# Altium PCB SPI Isolator.PcbDoc
Units mm, origin at the board's own origin, x right, y up, seen from the top; angles counter-clockwise.
Board outline 45 x 37.5 mm, 2 copper layers (Top Layer, Bottom Layer), stack 1.621 mm thick; 50 components, 25 nets, 118 pads, 154 vias.
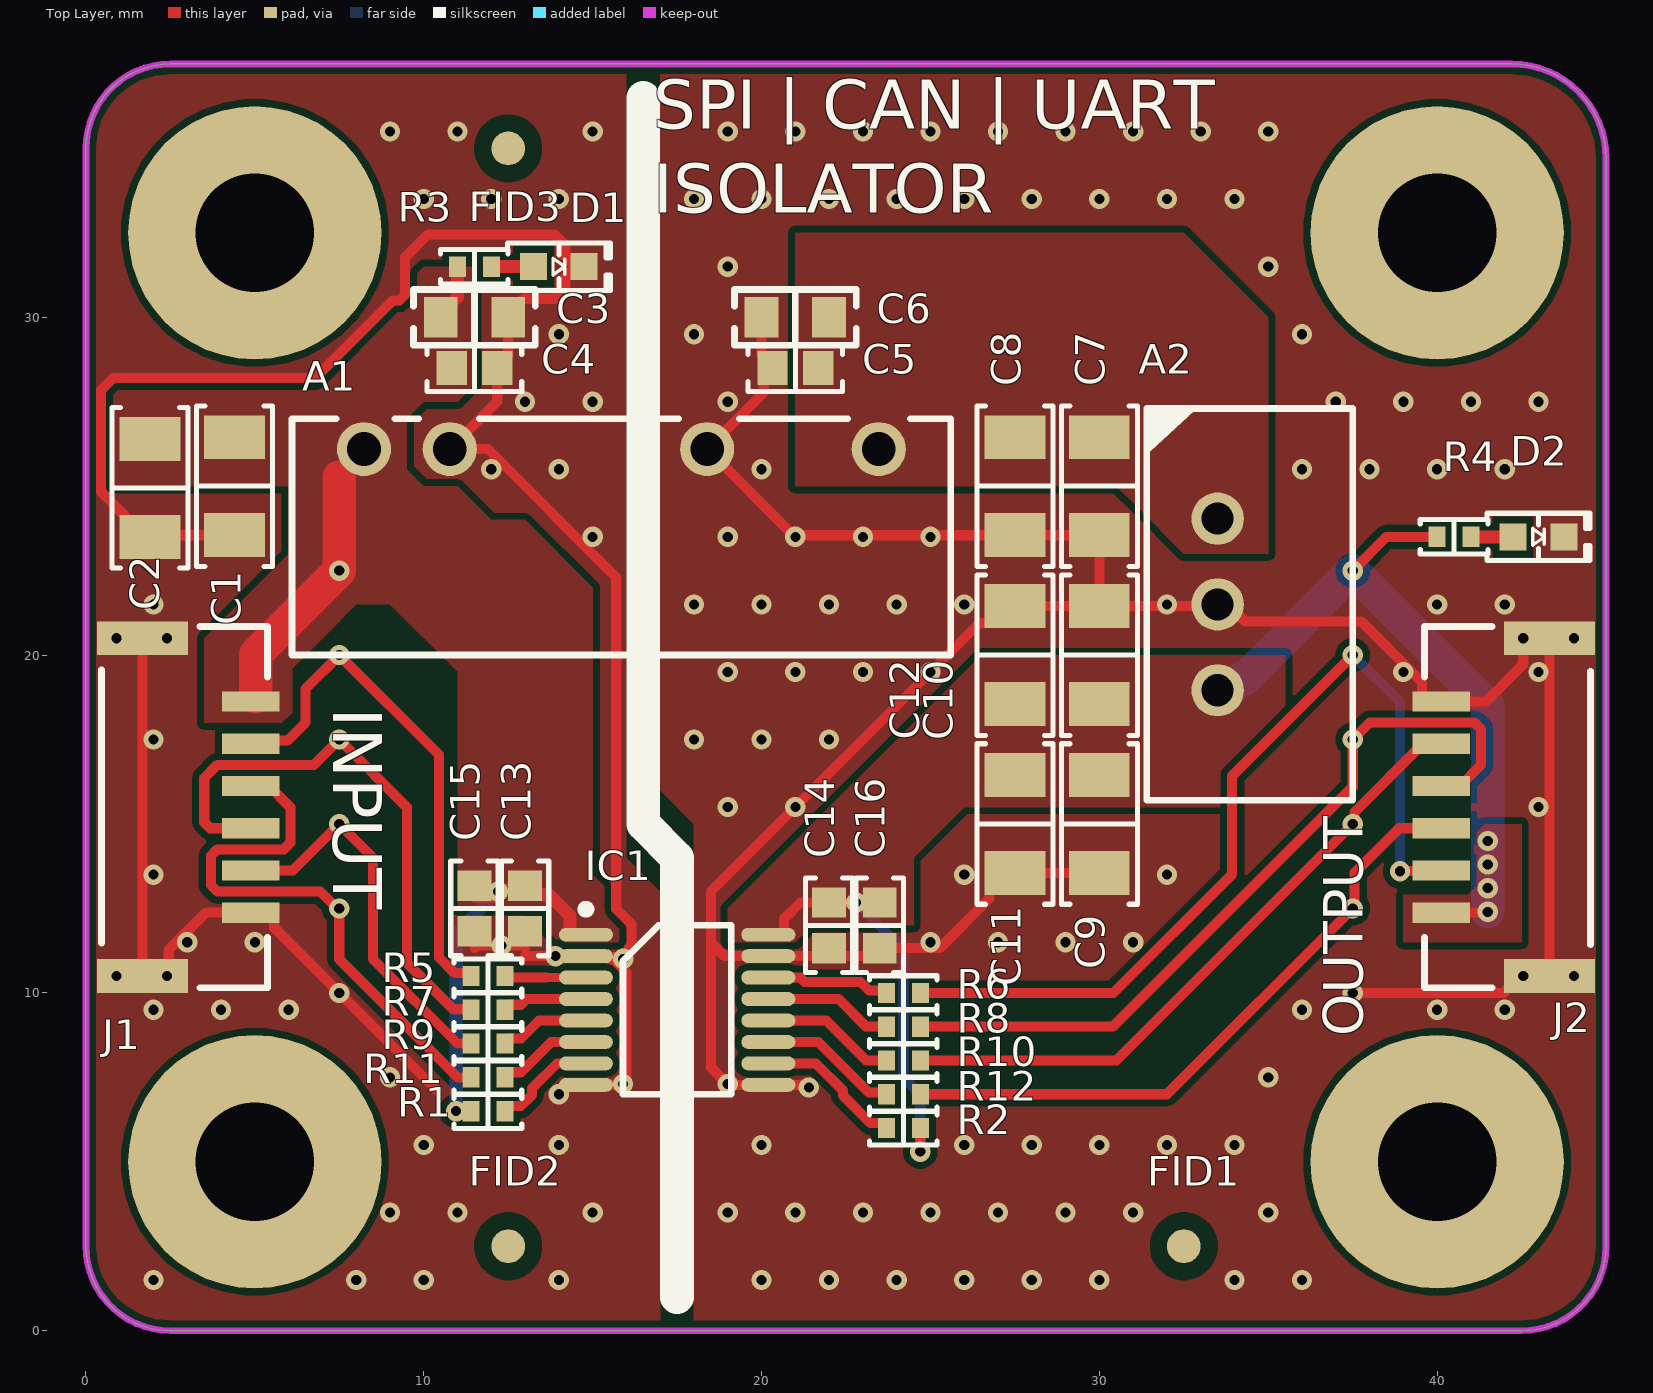
[diagram p0: Top Layer view]
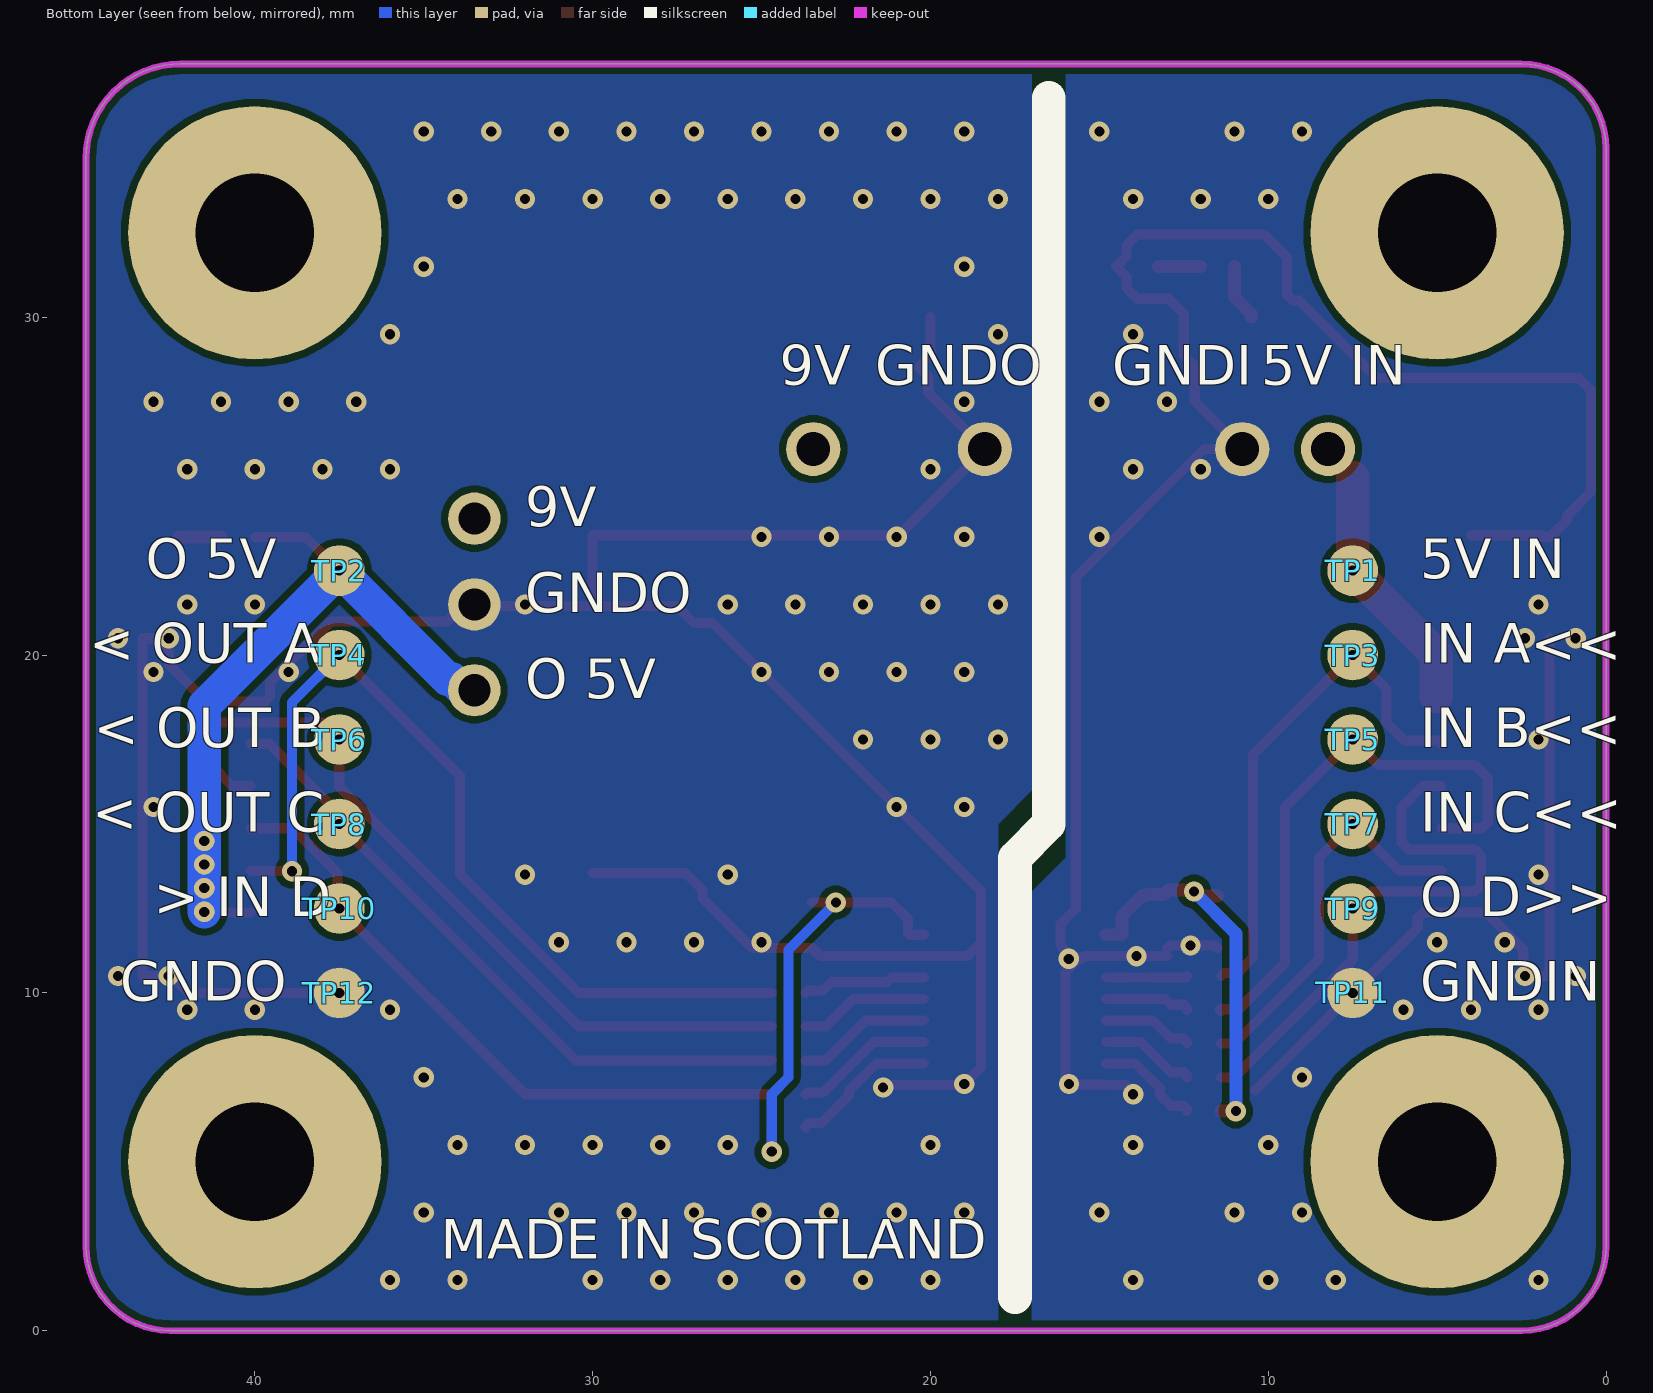
[diagram p1: Bottom Layer view, seen from below]

## Layer stack, top to bottom
Top Solder: solder mask 0.0102, Solder Resist, Dk 3.8
Top Layer: signal copper 0.0356
Dielectric 1: dielectric 1.55, FR-4, Dk 4.6
Bottom Layer: signal copper 0.0356
Bottom Solder: solder mask 0.0102, Solder Resist, Dk 3.8

## Board outline
0,2.5 0,35 cw(c2.5,35) 2.5,37.5 42.206,37.5 cw(c42.206,34.706) 45,34.706 45,2.5 cw(c42.5,2.5) 42.5,0 2.5,0 cw(c2.5,2.5)

## Design rules (kind name [scope] priority, off if disabled: settings)
Clearance [All] p1: gap=0.2 ignorepadtopadclearanceinfootprint=FALSE
ComponentClearance [All] p1: gap=0.254 collisioncheckmode=3 verticalgap=0.254 showdistances=TRUE
MinimumSolderMaskSliver [All] p1: minsoldermaskwidth=0.1
PlaneClearance [All] p1: clearance=0.2
PolygonConnect [All] p1: connectstyle=Direct reliefconductorwidth=0.254 reliefentries=4 polygonreliefangle="90 Angle" airgapwidth=0.254
RoutingVias [All] p1: holewidth=0.3 width=0.6 viastyle="Through Hole" minholewidth=0.3 minwidth=0.6 maxholewidth=6.3 maxwidth=6.6
SilkToSilkClearance [All] p1: silktosilkclearance=-3
SilkToSolderMaskClearance [IsPad] p1: minsilkscreentomaskgap=-3 clearancetoexposedcopper=TRUE
SolderMaskExpansion SolderMaskExpansion_Via [IsVia] p1: expansion=0.102 istentingtop=TRUE
SolderMaskExpansion [All] p2: expansion=0.05 istentingtop=FALSE
SupplyNets "Schematic Supply Nets_4" [InNet('DGND')] p1: voltage=0.000
SupplyNets "Schematic Supply Nets_3" [InNet('UGND')] p2: voltage=0.000
SupplyNets "Schematic Supply Nets_2" [InNet('U5V')] p3: voltage=0.000
SupplyNets "Schematic Supply Nets_1" [InNet('5VO')] p4: voltage=0.000
SupplyNets "Schematic Supply Nets" [InNet('9V')] p5: voltage=0.000
Width [All] p1: maxlimit=3 minlimit=0.09 preferedwidth=0.2
25 further rules are at their usual default settings.

## Components (designator, comment, footprint, x,y, rotation, side; value= is the part's Value field where it differs from the comment)
A1 "3S7B_0509S3U" "GAPTEC 3S7B_3U SINGLE" 16,23.5 r0 top
A2 "LCB78_05-0.5" "GAPTEC LCB78_0.5" 34.5,21.5 r270 top
C1 "10 µF" "CAP 1206_3216 - 0.8MM" 4.4,25 r90 top
C2 "10 µF" "CAP 1206_3216 - 0.8MM" 1.9,24.95 r90 top
C3 "4.7 µF" "MURATA GRM188 0603_1608" 11.5,30 r180 top
C4 "0.1 µF" "CAP 0603_1608" 11.5,28.5 r180 top
C5 "0.1 µF" "CAP 0603_1608" 21,28.5 r0 top
C6 "4.7 µF" "MURATA GRM188 0603_1608" 21,30 r0 top
C7 "10 µF" "CAP 1206_3216 - 0.8MM" 30,25 r90 top
C8 "10 µF" "CAP 1206_3216 - 0.8MM" 27.5,25 r90 top
C9 "10 µF" "CAP 1206_3216 - 0.8MM" 30,15 r90 top
C10 "10 µF" "CAP 1206_3216 - 0.8MM" 30,20 r270 top
C11 "10 µF" "CAP 1206_3216 - 0.8MM" 27.5,15 r90 top
C12 "10 µF" "CAP 1206_3216 - 0.8MM" 27.5,20 r270 top
C13 "0.1 µF" "CAP 0603_1608" 13,12.5 r270 top
C14 "0.1 µF" "CAP 0603_1608" 22,12 r90 top
C15 "0.1 µF" "CAP 0603_1608" 11.5,12.5 r270 top
C16 "0.1 µF" "CAP 0603_1608" 23.5,12 r90 top
D1 "Green" "LED 0603_1608 GREEN" 14,31.5 r0 top
D2 "Green" "LED 0603_1608 GREEN" 43,23.5 r0 top
FID1 "Fiducial" Fiducial-1mm 32.5,2.5 r90 top
FID2 "Fiducial" Fiducial-1mm 12.5,2.5 r90 top
FID3 "Fiducial" Fiducial-1mm 12.5,35 r90 top
IC1 "ISO6541QDBQRQ1" "TI SSOP-16 DBQ0016A" 17.5,9.5 r0 top
J1 "SM06B-GHS-TB(LF)(SN)" "JST SM06B-GHS-TB" 3,15.5 r90 top
J2 "SM06B-GHS-TB(LF)(SN)" "JST SM06B-GHS-TB" 42,15.5 r270 top
R1 "1 kOhms" "YAGEO RES 0402_1005" 11.9,6.5 r0 top
R2 "1 kOhms" "YAGEO RES 0402_1005" 24.2,6 r180 top
R3 "1 kOhms" "YAGEO RES 0402_1005" 11.5,31.5 r0 top
R4 "1 kOhms" "YAGEO RES 0402_1005" 40.5,23.5 r0 top
R5 "33 Ohms" "YAGEO RES 0402_1005" 11.9,10.5 r180 top
R6 "10 Ohms" "YAGEO RES 0402_1005" 24.2,10 r0 top
R7 "33 Ohms" "YAGEO RES 0402_1005" 11.9,9.5 r180 top
R8 "10 Ohms" "YAGEO RES 0402_1005" 24.2,9 r0 top
R9 "33 Ohms" "YAGEO RES 0402_1005" 11.9,8.5 r180 top
R10 "10 Ohms" "YAGEO RES 0402_1005" 24.2,8 r0 top
R11 "10 Ohms" "YAGEO RES 0402_1005" 11.9,7.5 r0 top
R12 "33 Ohms" "YAGEO RES 0402_1005" 24.2,7 r180 top
TP1 "Test Point" TestPoint-1.5mm 7.5,22.5 r180 bottom
TP2 "Test Point" TestPoint-1.5mm 37.5,22.5 r90 bottom
TP3 "Test Point" TestPoint-1.5mm 7.5,20 r90 bottom
TP4 "Test Point" TestPoint-1.5mm 37.5,20 r90 bottom
TP5 "Test Point" TestPoint-1.5mm 7.5,17.5 r90 bottom
TP6 "Test Point" TestPoint-1.5mm 37.5,17.5 r90 bottom
TP7 "Test Point" TestPoint-1.5mm 7.5,15 r90 bottom
TP8 "Test Point" TestPoint-1.5mm 37.5,15 r90 bottom
TP9 "Test Point" TestPoint-1.5mm 7.5,12.5 r90 bottom
TP10 "Test Point" TestPoint-1.5mm 37.5,12.5 r90 bottom
TP11 "Test Point" TestPoint-1.5mm 7.5,10 r90 bottom
TP12 "Test Point" TestPoint-1.5mm 37.5,10 r90 bottom

## Footprints (in the part's own frame and the unit in brackets; to place one, negate y for a bottom-side part, rotate by r counter-clockwise, add the part's x,y. Pads: shape width x height; smd on the part's side, far side on the other; paste and mask are expansions set on the pad)
"CAP 0603_1608" [mm] "Chip Capacitor, 2-Leads, Body 1.60x0.80mm, IPC Medium Density"
  rect 0.9x1 smd: 1(-0.675,0) 2(0.675,0)
  silkscreen extent -1.4,-0.7 1.4,0.7, body extent -0.8,-0.41 0.8,0.41, height 0.82
"CAP 1206_3216 - 0.8MM" [mm] "Chip Capacitor, 2-Leads, Body 3.25x1.60mm, IPC Medium Density"
  rect 1.3x1.8 smd: 1(-1.45,0) 2(1.45,0)
  silkscreen extent -2.37,-1.12 2.37,1.12, body extent -1.6,-0.8 1.6,0.8, height 0.8
Fiducial-1mm [mm]
  round 1 smd paste-1 mask+0.5: F(0,0)
  Top Layer pour cut-out: -1,0 -0.924,0.383 -0.707,0.707 -0.383,0.924 0,1 0,1 0.383,0.924 0.707,0.707 0.924,0.383 1,0 1,0 0.924,-0.383 0.707,-0.707 0.383,-0.924 0,-1 0,-1 -0.383,-0.924 -0.707,-0.707 -0.924,-0.383 -1,0
"GAPTEC 3S7B_3U SINGLE" [mm] "3W Single/Dual Output - Fixed Input - Isolated & Semi-regulated"
  round 1.6 hole 1: 1(-7.77,2.6) 2(-5.23,2.6) 5(2.39,2.6) 7(7.47,2.6)
  silkscreen extent -9.9,-3.5 9.6,3.5, body extent -9.95,-3.5 9.65,3.5, height 10
"GAPTEC LCB78_0.5" [mm] "Wide Input Non-Isolated & Regulated, Single Output"
  round 1.55 hole 0.95: 1(-2.54,-1) 2(0,-1) 3(2.54,-1)
  silkscreen extent -5.8,-3.1 5.8,3, body extent -5.8,-3 5.8,3, height 10.2
"JST SM06B-GHS-TB" [mm] "1.25mm pitch/Disconnectable Crimp style connectors"
  rect 0.6x1.7 smd: 1(-3.125,-1.875) 2(-1.875,-1.875) 3(-0.625,-1.875) 4(0.625,-1.875) 5(1.875,-1.875) 6(3.125,-1.875)
  rect 1x2.7 smd: M(-5,1.325) M(5,1.325)
  silkscreen extent -5.35,-2.37 5.35,2.54, body extent -5.38,-2.31 5.37,2.54, height 4.35
"LED 0603_1608 GREEN" [mm] "Chip Diode, 2-Leads, Body 1.60x0.80mm, IPC Medium Density"
  rect 0.8x0.8 smd: 1(-0.75,0) 2(0.75,0)
  silkscreen extent -1.52,-0.7 1.52,0.7, body extent -0.8,-0.4 0.8,0.4, height 0.53
"MURATA GRM188 0603_1608" [mm] "Chip Capacitor, 2-Leads, Body 1.60x0.80mm"
  rect 1x1.2 smd: 1(-1,0) 2(1,0)
  silkscreen extent -1.8,-0.83 1.8,0.83, body extent -0.9,-0.5 0.9,0.5, height 1
TestPoint-1.5mm [mm]
  round 1.5 smd: 1(0,0)
"TI SSOP-16 DBQ0016A" [mm] "SSOP, 16-Leads, Body 4.90x3.89mm, Pitch 0.64mm"
  oval 1.6x0.41 smd: 1(-2.7,2.222) 2(-2.7,1.587) 3(-2.7,0.953) 4(-2.7,0.318) 5(-2.7,-0.318) 6(-2.7,-0.953) 7(-2.7,-1.587) 8(-2.7,-2.222) 9(2.7,-2.222) 10(2.7,-1.587) 11(2.7,-0.953) 12(2.7,-0.318) 13(2.7,0.318) 14(2.7,0.953) 15(2.7,1.587) 16(2.7,2.222)
  silkscreen extent -2.82,-2.5 1.6,3.1, body extent -3.01,-2.45 3.01,2.45, height 1.75
"YAGEO RES 0402_1005" [mm] "Chip Resistor, 2-Leads, Body 1.0x0.5mm"
  rect 0.5x0.6 smd: 1(-0.5,0) 2(0.5,0)
  silkscreen extent -1,-0.51 1,0.51, body extent -0.5,-0.25 0.5,0.25, height 0.35

## Part data
A1: "DC-DC", Current - Output (Max)=333mA, manufacturer="GAPTEC Electronic", Operating Temperature="-40°C ~ 85°C", Power (Watts)="3 W", Supplier Part Number 1=3182-3S7B_0509S3U-ND, Voltage - Input (Max)=5.5V, Voltage - Input (Min)=4.5V, Voltage - Isolation="3 kV", Voltage - Output 1=9V, Applications="ITE (Commercial)", componentlink1description=Datasheet, componentlink1url=https://gaptec-electronic.com/datenblaetter/3S7B_3U.pdf, componentlink2description="DigiKey Link", componentlink2url=https://www.digikey.com/en/products/detail/gaptec-electronic/3S7B-0509S3U/13692545, Efficiency=84%, lastupdated="01/09/2023 20:51:51", Lifecycle Status=Active, Minimum Order=1, Mounting Type="Through Hole", Number of Outputs=1, packaging=Tube, Part Number=3S7B_0509S3U, Part Status=Active, partid=72, price=5.05, series="3S7B_3U (3W)", Size / Dimension="0.77\" L x 0.28\" W x 0.39\" H (19.6mm x 7.0mm x 10.0mm)", Supplier 1=DigiKey, Type="Isolated Module"
A2: "DC-DC POL", Current - Output (Max)=500mA, manufacturer="GAPTEC Electronic", Operating Temperature="-40°C ~ 85°C (With Derating)", Power (Watts)="2.5 W", Supplier Part Number 1=3182-LCB78_05-0.5-ND, Voltage - Input (Max)=55V, Voltage - Input (Min)=6.5V, Voltage - Output 1=5V, Applications="ITE (Commercial)", componentlink1description=Datasheet, componentlink1url=https://gaptec-electronic.com/datenblaetter/LCB78_0.5.pdf, componentlink2description="DigiKey Link", componentlink2url=https://www.digikey.com/en/products/detail/gaptec-electronic/LCB78-05-0-5/13691990, Efficiency=95%, lastupdated="04/09/2023 17:37:46", Lifecycle Status=Active, Minimum Order=1, Mounting Type="Through Hole", Number of Outputs=1, packaging=Tube, Part Number=LCB78_05-0.5, Part Status=Active, partid=87, price=5.66, series=LCB78_0.5, Size / Dimension="0.46\" L x 0.24\" W x 0.40\" H (11.6mm x 6.0mm x 10.2mm)", Supplier 1=DigiKey, Type="Non-Isolated PoL Module"
C1 C2 C7 C8 C9 C10 C11 C12: library part CL31B106KAHNNNE, "CAP CER 10UF 25V X7R 1206", Device Package="1206 (3216 Metric)", manufacturer="Samsung Electro-Mechanics", Operating Temperature="-55°C ~ 125°C", Supplier Part Number 1=1276-1804-1-ND, Temperature Coefficient=X7R, Tolerance=±10%, Voltage - Rated=25V, Applications="General Purpose", Capacitance="10 µF", componentlink1description=Datasheet, componentlink1url=http://www.samsungsem.com/kr/support/product-search/mlcc/CL31B106KAHNNNE.jsp, componentlink2description="DigiKey Link", componentlink2url=https://www.digikey.com/en/products/detail/samsung-electro-mechanics/CL31B106KAHNNNE/3887462, lastupdated="03/09/2023 19:14:37", Lifecycle Status=Active, Minimum Order=1, Mounting Type="Surface Mount, MLCC", Package / Case="1206 (3216 Metric)", packaging=TapeAndReel, Part Number=CL31B106KAHNNNE, Part Status=Active, partid=40754, price=0.03, series=CL, Size / Dimension="0.126\" L x 0.063\" W (3.20mm x 1.60mm)", Supplier 1=DigiKey, Thickness (Max)="0.071\" (1.80mm)"
C3 C6: library part GRM188R61E475KE11D, "CAP CER 4.7UF 25V X5R 0603", Device Package="0603 (1608 Metric)", manufacturer="Murata Electronics", Operating Temperature="-55°C ~ 85°C", Supplier Part Number 1=490-7203-1-ND, Temperature Coefficient=X5R, Tolerance=±10%, Voltage - Rated=25V, Applications="General Purpose", Capacitance="4.7 µF", componentlink1description=Datasheet, componentlink1url=https://www.murata.com/~/media/webrenewal/support/library/catalog/products/capacitor/mlcc/c02e.ashx?la=en-us, componentlink2description="DigiKey Link", componentlink2url=https://www.digikey.com/en/products/detail/murata-electronics/GRM188R61E475KE11D/3900465, lastupdated="20/07/2024 00:23:22", Lifecycle Status=Active, Minimum Order=1, Mounting Type="Surface Mount, MLCC", Package / Case="0603 (1608 Metric)", packaging=TapeAndReel, Part Number=GRM188R61E475KE11D, Part Status=Active, partid=2387, price=0.04, series=GRM, Size / Dimension="0.063\" L x 0.031\" W (1.60mm x 0.80mm)", Supplier 1=DigiKey, Thickness (Max)="0.037\" (0.95mm)"
C4 C5 C13 C14 C15 C16: library part CL10B104KB8NNNC, "CAP CER 0.1UF 50V X7R 0603", Device Package="0603 (1608 Metric)", manufacturer="Samsung Electro-Mechanics", Operating Temperature="-55°C ~ 125°C", Supplier Part Number 1=1276-1000-1-ND, Temperature Coefficient=X7R, Tolerance=±10%, Voltage - Rated=50V, Applications="General Purpose", Capacitance="0.1 µF", componentlink1description=Datasheet, componentlink1url=http://www.samsungsem.com/kr/support/product-search/mlcc/CL10B104KB8NNNC.jsp, componentlink2description="DigiKey Link", componentlink2url=https://www.digikey.com/en/products/detail/samsung-electro-mechanics/CL10B104KB8NNNC/3886658, lastupdated="20/08/2023 19:09:00", Lifecycle Status=Active, Minimum Order=1, Mounting Type="Surface Mount, MLCC", Package / Case="0603 (1608 Metric)", packaging=TapeAndReel, Part Number=CL10B104KB8NNNC, Part Status=Active, partid=9788, price=0.01, series=CL, Size / Dimension="0.063\" L x 0.031\" W (1.60mm x 0.80mm)", Supplier 1=DigiKey, Thickness (Max)="0.035\" (0.90mm)"
D1 D2: library part "LG Q976.01-MGNI-35-1", "LED GREEN CLEAR 0603 SMD", Current - Test=20mA, Device Package="0603 (1608 Metric)", Lens Color=Colorless, manufacturer="ams-OSRAM USA Inc.", Millicandela Rating=31.5mcd, Supplier Device Package=0603, Supplier Part Number 1=475-LGQ976.01-MGNI-35-1CT-ND, Voltage - Forward (Vf) (Typ)=2V, Color=Green, componentlink2description="DigiKey Link", componentlink2url=https://www.digikey.com/en/products/detail/ams-osram-usa-inc/LG-Q976-01-MGNI-35-1/21556493, Height (Max)=0.75mm, lastupdated="03/06/2024 19:58:39", Lens Size="1.10mm x 0.80mm", Lens Style="Rectangle with Flat Top", Lens Transparency=Clear, Lifecycle Status=Active, Minimum Order=1, Mounting Type="Surface Mount", Package / Case="0603 (1608 Metric)", packaging=TapeAndReel, Part Number="LG Q976.01-MGNI-35-1", partid=1447, price=0.02, series="LO Q976.01", Size / Dimension="1.60mm L x 0.80mm W", Supplier 1=DigiKey, Viewing Angle=140°, Wavelength - Dominant=574nm, Wavelength - Peak=574nm
FID1 FID2 FID3: library part CMP-002-000000-1, Component Type=Standard, Design Item ID=Fiducial, Pin Count=0, Source=Fiducial.SchLib
IC1: "AUTOMOTIVE, 100-V ISOLATION", Isolated Power=Yes, manufacturer="Texas Instruments", Operating Temperature="-40°C ~ 125°C", Supplier Device Package=16-SSOP, Supplier Part Number 1=296-ISO6541QDBQRQ1CT-ND, Voltage - Isolation=707Vrms, Voltage - Supply="1.71V ~ 1.89V, 2.25V ~ 5.5V", Channel Type=Unidirectional, Common Mode Transient Immunity (Min)=100kV/µs, componentlink1description=Datasheet, componentlink1url=https://www.ti.com/lit/ds/symlink/iso6521-q1.pdf?ts=1748606133465&ref_url=https%253A%252F%252Fwww.ti.com%252Fproduct%252FISO6521-Q1%252Fpart-details%252FISO6521FQDRQ1, componentlink2description="DigiKey Link", componentlink2url=https://www.digikey.com/en/products/detail/texas-instruments/ISO6541QDBQRQ1/26692274, Data Rate=50Mbps, Inputs - Side 1/Side 2=3/1, lastupdated="15/07/2025 15:42:45", Lifecycle Status=Active, Minimum Order=1, Mounting Type="Surface Mount", Number of Channels=4, packaging=TapeAndReel, Part Number=ISO6541QDBQRQ1, partid=50, price=0.70, Propagation Delay tpLH / tpHL (Max)="18ns, 18ns", Pulse Width Distortion (Max)=7ns, Rise / Fall Time (Typ)="2.6ns, 2.6ns", series=-, Supplier 1=DigiKey, Technology="Capacitive Coupling", Type="CAN, SPI"
J1 J2: "CONN HEADER SMD R/A 6POS 1.25MM", Current Rating (Amps)=1A, Insulation Color=Natural, manufacturer="JST Sales America Inc.", Material Flammability Rating="UL94 V-0", Operating Temperature="-25°C ~ 85°C", Supplier Part Number 1=455-1568-1-ND, Voltage Rating=50V, componentlink1description=Datasheet, componentlink1url=http://www.jst-mfg.com/product/pdf/eng/eGH.pdf, componentlink2description="DigiKey Link", componentlink2url=http://digikey.com/product-detail/en/jst-sales-america-inc/SM06B-GHS-TB-LF-SN/455-1568-1-ND/807836, Connector Type=Header, Contact Finish - Mating=Tin, Contact Finish - Post=Tin, Contact Material="Phosphor Bronze", Contact Shape=Rectangular, Contact Type="Outer Shroud Contact", Fastening Type="Locking Ramp", Features="Solder Retention", Insulation Height="0.167\" (4.25mm)", Insulation Material="Polyamide (PA9T), Nylon 9T", lastupdated="12/01/2020 23:38:11", Lifecycle Status=Active, Minimum Order=1, Mounting Type="Surface Mount, Right Angle", Number of Positions=6, Number of Positions Loaded=All, Number of Rows=1, packaging=TapeAndReel, Part Number=SM06B-GHS-TB(LF)(SN), Part Status=Active, partid=57, Pitch - Mating="0.049\" (1.25mm)", price=0.25, series=GH, Shrouding="Shrouded - 4 Wall", Style="Board to Cable/Wire", Supplier 1=DigiKey, Termination=Solder
R1 R2 R3 R4: library part RC0402FR-071KP, "RES 1K OHM 1% 1/16W 0402", Device Package="0402 (1005 Metric)", manufacturer=Yageo, Operating Temperature="-55°C ~ 155°C", Power (Watts)="0.063W, 1/16W", Ratings="7C1 RoHS w/out Exemption (100% Pb-Free)", Supplier Device Package=0402, Supplier Part Number 1=YAG1254CT-ND, Temperature Coefficient=±100ppm/°C, Tolerance=±1%, componentlink1description=Datasheet, componentlink1url=http://www.yageo.com/NewPortal/yageodocoutput?fileName=/pdf/R-Chip/PYu-RC_51_RoHS_P_0.pdf, componentlink2description="DigiKey Link", componentlink2url=https://www.digikey.com/en/products/detail/yageo/RC0402FR-071KP/4935269, Composition="Thick Film", Features="Moisture Resistant", Height - Seated (Max)="0.016\" (0.40mm)", lastupdated="25/07/2024 09:18:12", Lifecycle Status=Active, Minimum Order=1, Number of Terminations=2, Package / Case="0402 (1005 Metric)", packaging=CutTape, Part Number=RC0402FR-071KP, Part Status=Active, partid=16161, price=0.01, Resistance="1 kOhms", series=RC_P, Size / Dimension="0.039\" L x 0.020\" W (1.00mm x 0.50mm)", Supplier 1=DigiKey
R5 R7 R9 R12: library part RC0402FR-0733RP, "RES 33 OHM 1% 1/16W 0402", Device Package="0402 (1005 Metric)", manufacturer=Yageo, Operating Temperature="-55°C ~ 155°C", Power (Watts)="0.063W, 1/16W", Ratings="7C1 RoHS w/out Exemption (100% Pb-Free)", Supplier Device Package=0402, Supplier Part Number 1=YAG1264CT-ND, Temperature Coefficient=±100ppm/°C, Tolerance=±1%, componentlink1description=Datasheet, componentlink1url=http://www.yageo.com/NewPortal/yageodocoutput?fileName=/pdf/R-Chip/PYu-RC_51_RoHS_P_0.pdf, componentlink2description="DigiKey Link", componentlink2url=https://www.digikey.com/en/products/detail/yageo/RC0402FR-0733RP/4935279, Composition="Thick Film", Features="Moisture Resistant", Height - Seated (Max)="0.016\" (0.40mm)", lastupdated="25/07/2024 09:18:15", Lifecycle Status=Active, Minimum Order=1, Number of Terminations=2, Package / Case="0402 (1005 Metric)", packaging=CutTape, Part Number=RC0402FR-0733RP, Part Status=Active, partid=9331, price=0.01, Resistance="33 Ohms", series=RC_P, Size / Dimension="0.039\" L x 0.020\" W (1.00mm x 0.50mm)", Supplier 1=DigiKey
R6 R8 R10 R11: library part RC0402FR-1310RL, "RES 10 OHM 1% 1/16W 0402", Device Package="0402 (1005 Metric)", manufacturer=Yageo, Operating Temperature="-55°C ~ 155°C", Power (Watts)="0.063W, 1/16W", Supplier Device Package=0402, Supplier Part Number 1=13-RC0402FR-1310RLCT-ND, Temperature Coefficient=±200ppm/°C, Tolerance=±1%, componentlink1description=Datasheet, componentlink1url=https://www.yageo.com/upload/media/product/productsearch/datasheet/rchip/PYu-RC_Group_51_RoHS_L_11.pdf, componentlink2description="DigiKey Link", componentlink2url=https://www.digikey.com/en/products/detail/yageo/RC0402FR-1310RL/13694088, Composition="Thick Film", Features="Moisture Resistant", Height - Seated (Max)="0.016\" (0.40mm)", lastupdated="25/07/2024 09:18:04", Lifecycle Status=Active, Minimum Order=1, Number of Terminations=2, Package / Case="0402 (1005 Metric)", packaging=CutTape, Part Number=RC0402FR-1310RL, Part Status=Active, partid=64947, price=0.01, Resistance="10 Ohms", series=RC_L, Size / Dimension="0.039\" L x 0.020\" W (1.00mm x 0.50mm)", Supplier 1=DigiKey
TP1 TP2 TP3 TP4 TP5 TP6 TP7 TP8 TP9 TP10 TP11 TP12: library part CMP-003-000000-1, Component Type="Standard (No BOM)", Design Item ID="Test Point", Pin Count=1, Source="Test Point.SchLib"

## Free pads (board coordinates)
  round 7.5 hole 3.5 paste-2539.97 mask+0.102: M(5,5) M(5,32.5) M1(40,5) M1(40,32.5)

## Via types
v1: diameter 0.6, hole 0.3, Top Layer to Bottom Layer, tented both sides, 154 vias

## Nets (pads, with @x,y where several pads share a name; then routed paths per layer and width w, separated by ;. In a path a pad name is that pad's centre, name@x,y a point inside that pad or via, vN(x,y) a via of type N, cw(c..) or ccw(c..) an arc to the next point about the centre after c; other vN are vias at no path point)
5VO: A2.3 C9.2 C10.2 C11.2 C12.2 C14.2 C16.2 IC1.16 J2.6 R2.1 R4.1 TP2.1 | length 34.3
  Top Layer w0.3: IC1.16 20.61,11.723 20.661,11.773 20.661,12.183 21.153,12.675 C14.2 v1(22.8,12.675) C16.2 ; v1(24.7,5.3) R2.1 ; v1(37.5,22.5) 38.5,23.5 R4.1 ; J2.6 41.475,12.375 v1(41.5,12.4)
  Bottom Layer w0.3: v1(22.8,12.675) 24.2,11.275 24.2,7.5 24.7,7 v1(24.7,5.3)
  Bottom Layer w1: A2.3 33.838,18.96 34.174,19.296 34.296,19.296 v1(37.5,22.5) 41.5,18.5 v1(41.5,14.5) v1(41.5,13.8) v1(41.5,13.1) v1(41.5,12.4)
9V: A1.7 A2.1 C5.2 C6.2 C7.2 C8.2
DEN: IC1.10 R2.2 | length 4.4
  Top Layer w0.3: IC1.10 21.607,7.913 22.414,7.105 22.414,6.958 23.222,6.15 23.6,6.15 23.7,6.05 R2.2
DGND: A1.5 A2.2 C5.1 C6.1 C7.1 C8.1 C9.1 C10.1 C11.1 C12.1 C14.1 C16.1 D2.2 IC1.9 IC1.15 J2.1 J2.M TP12.1 | length 87.6
  Top Layer w0.3: C6.1 20,28.875 20.325,28.55 C5.1 20.064,28.239 20.064,27.774 A1.5 20.94,23.55 C8.1 C7.1 C10.1 ; v1(21.4,7.2) 21.319,7.2 21.247,7.272 20.205,7.272 IC1.9 19.022,7.278 v1(19,7.3) 18.5,7.8 18.5,11.5 ; C9.1 C11.1 27.25,13.55 26.75,13.05 26.75,12.8 25.275,11.325 C16.1 23.263,11.088 IC1.15 18.912,11.088 18.5,11.5 ; v1(37.5,10) 41.975,10 42.475,10.5 43.325,10.5 43.325,20.5 42.901,20.5 42.551,20.15 42.551,19.726 41.45,18.625 J2.1 39.701,18.625 39.551,18.775 39.551,19.199 37.75,21 34.301,21 33.801,21.5 A2.2 33.45,21.45 C10.1 ; 18.5,11.5 18.5,13 26.45,20.95 27,20.95 C12.1 C10.1
  other v1: 20,1.5 22,1.5 24,1.5 26,1.5 28,1.5 30,1.5 34,1.5 36,1.5 19,3.5 21,3.5 23,3.5 25,3.5 27,3.5 29,3.5 31,3.5 35,3.5 20,5.5 26,5.5 28,5.5 30,5.5 32,5.5 34,5.5 35,7.5 36,9.5 40,9.5 42,9.5 42.55,10.5 44.05,10.5 25,11.5 27,11.5 29,11.5 31,11.5 26,13.5 32,13.5 19,15.5 21,15.5 43,15.5 18,17.5 20,17.5 22,17.5 19,19.5 21,19.5 23,19.5 25,19.5 39,19.5 43,19.5 42.55,20.5 44.05,20.5 18,21.5 20,21.5 22,21.5 24,21.5 26,21.5 32,21.5 40,21.5 42,21.5 19,23.5 21,23.5 23,23.5 25,23.5 20,25.5 36,25.5 38,25.5 40,25.5 42,25.5 19,27.5 37,27.5 39,27.5 41,27.5 43,27.5 18,29.5 36,29.5 19,31.5 35,31.5 18,33.5 20,33.5 22,33.5 24,33.5 26,33.5 28,33.5 30,33.5 32,33.5 34,33.5 19,35.5 21,35.5 23,35.5 25,35.5 27,35.5 29,35.5 31,35.5 33,35.5 35,35.5
INA: J1.5 R5.2 TP3.1 | length 15.6
  Top Layer w0.3: J1.5 4.968,17.468 5.968,17.468 6.5,18 6.5,19 v1(7.5,20) 10.45,17.05 10.45,11.05 10.907,10.593 11.307,10.593 R5.2
INB: J1.3 R7.2 TP5.1 | length 17.1
  Top Layer w0.3: J1.3 3.676,14.875 3.5,15.051 3.5,16.36 3.89,16.75 6.75,16.75 v1(7.5,17.5) 9.5,15.5 9.5,10.89 10.876,9.514 11.386,9.514 R7.2
INC: J1.2 R9.2 TP7.1 | length 11.5
  Top Layer w0.3: J1.2 6.125,13.625 v1(7.5,15) 8.5,14 8.5,11 11,8.5 R9.2
IND: J2.4 R12.1 TP10.1 | length 19.3
  Top Layer w0.3: R12.1 32,7 v1(37.5,12.5) 37.557,12.557 37.557,13.557 38.875,14.875 J2.4
NetD1_1: D1.1 R3.2 | length 1.3
  Top Layer w0.381: R3.2 D1.1
NetD2_1: D2.1 R4.2 | length 1.3
  Top Layer w0.381: R4.2 D2.1
NetIC1_3: IC1.3 R5.1 | length 2.4
  Top Layer w0.27: 13.616,10.453 IC1.3@14.184,10.453
  Top Layer w0.3: R5.1 12.447,10.453 13.616,10.453 ; IC1.3@14.184,10.453 IC1.3
NetIC1_4: IC1.4 R7.1 | length 2.6
  Top Layer w0.3: R7.1 12.4,9.55 12.5,9.65 12.7,9.65 12.878,9.65 13.045,9.818 IC1.4
NetIC1_5: IC1.5 R9.1 | length 2.7
  Top Layer w0.3: R9.1 12.4,8.55 12.5,8.65 12.8,8.65 12.878,8.65 13.41,9.183 IC1.5
NetIC1_6: IC1.6 R11.2 | length 2.9
  Top Layer w0.3: R11.2 12.4,7.55 12.5,7.65 12.878,7.65 13.775,8.548 IC1.6
NetIC1_11: IC1.11 R12.2 | length 4.1
  Top Layer w0.3: IC1.11 21.679,8.548 23.176,7.051 23.649,7.051 R12.2
NetIC1_12: IC1.12 R10.1 | length 4
  Top Layer w0.3: IC1.12 21.917,9.183 23.1,8 R10.1
NetIC1_13: IC1.13 R8.1 | length 3.8
  Top Layer w0.3: IC1.13 22.282,9.818 23.1,9 R8.1
NetIC1_14: IC1.14 R6.1 | length 3.7
  Top Layer w0.3: IC1.14 21.145,10.453 21.272,10.325 22.928,10.325 23.183,10.07 23.63,10.07 R6.1
OUTA: J2.5 R6.2 TP4.1 | length 26.9
  Top Layer w0.3: R6.2 30.419,10 33.931,13.512 33.931,16.431 v1(37.5,20) ; v1(38.9,13.6) 38.913,13.613 40.113,13.613 J2.5
  Bottom Layer w0.3: v1(37.5,20) 38.9,18.6 v1(38.9,13.6)
OUTB: J2.3 R8.2 TP6.1 | length 23.7
  Top Layer w0.3: R8.2 30.4,9 37.5,16.1 v1(37.5,17.5) 38,18 41.11,18 41.3,17.81 41.3,16.75 40.675,16.125 J2.3
OUTC: J2.2 R10.2 TP8.1 | length 19.5
  Top Layer w0.3: R10.2 30.5,8 31.682,9.183 37.557,15.057 37.557,15.357 39.575,17.375 J2.2
  other v1: 37.5,15
OUTD: J1.4 R11.1 TP9.1 | length 16.8
  Top Layer w0.3: J1.4 5.425,16.125 6.05,15.5 6.05,14.44 5.86,14.25 3.89,14.25 3.7,14.06 3.7,13.19 3.89,13 6.939,13 7.439,12.5 v1(7.5,12.5) 7.5,11 11,7.5 R11.1
U5V: A1.1 C1.2 C2.2 C3.2 C4.2 C13.1 C15.1 IC1.1 J1.6 R1.1 R3.1 TP1.1 | length 22
  Top Layer w0.381: 7.5,25.267 8.23,25.997 A1.1 ; C3.2 10.5,30.1 11,30.6 R3.1 ; v1(10.959,6.5) R1.1 ; C15.1@11.5,12.866 12.006,12.866 12.141,13 v1(12.2,13) 12.242,13.042 12.958,13.042 13.084,12.916 13.607,12.916 13.657,12.866 13.745,12.866 14.334,12.276 14.334,11.736 14.348,11.723 IC1.1
  Top Layer w1: J1.6@5.027,18.777 5.027,20.027 v1(7.5,22.5) 7.5,25.267
  Bottom Layer w0.381: v1(10.959,6.5) 10.959,11.759 v1(12.2,13)
UEN: IC1.7 R1.2 | length 3.1
  Top Layer w0.3: R1.2 12.4,6.55 12.5,6.65 12.878,6.65 13.2,6.972 13.2,7.171 13.942,7.913 IC1.7
UGND: A1.2 C1.1 C2.1 C3.1 C4.1 C13.2 C15.2 D1.2 IC1.2 IC1.8 J1.1 J1.M TP11.1 | length 82.6
  Top Layer w0.3: J1.M@1.675,20.5 1.675,10.5 2.099,10.5 2.449,10.85 2.449,11.274 3.55,12.375 5.425,12.375 5.575,12.225 5.575,11.925 v1(7.5,10) 10.391,7.109 ; C2.1 1.65,23.5 1.15,24 1.15,24.126 0.45,24.826 0.45,27.85 0.8,28.2 6.781,28.2 9.081,30.5 9.274,30.5 9.45,30.676 9.45,31.778 10.122,32.45 13.878,32.45 14.2,32.128 14.2,31.8 14.5,31.5 14.2,31.2 14.2,30.872 13.878,30.55 12.95,30.55 12.5,30.1 12.5,28.875 C4.1@12.175,28.55 ; C2.1@1.9,23.55 C1.1@4,23.55 ; 11.5,11.325 11.575,11.4 v1(12.3,11.4) 12.925,11.4 13,11.325 ; C4.1 12.175,27.505 A1.2 11.9,26.1 15.7,22.3 15.7,12.485 16.15,12.035 16.15,11.41 16.057,11.317 16.057,11.239 15.907,11.089 v1(15.907,11.007) 15.826,11.007 15.767,11.066 15.617,11.066 IC1.2@15.446,11.066 ; 13,11.088 v1(13.9,11.088) IC1.2 15.425,11.088 IC1.2@15.446,11.066 ; v1(14,7) 14,7.043 14.235,7.278 IC1.8 14.811,7.289 15.889,7.289 v1(15.9,7.3) 15.9,7.381 16,7.481 16,10.604 15.617,10.988 15.525,10.988 IC1.2@15.446,11.066
  other v1: 2,1.5 8,1.5 10,1.5 14,1.5 9,3.5 11,3.5 15,3.5 10,5.5 14,5.5 9,7.5 2,9.5 4,9.5 6,9.5 0.9,10.5 2.4,10.5 3,11.5 5,11.5 2,13.5 2,17.5 0.9,20.5 2.4,20.5 2,21.5 15,23.5 12,25.5 14,25.5 13,27.5 15,27.5 14,29.5 10,33.5 12,33.5 14,33.5 9,35.5 11,35.5 15,35.5
pads on no net: FID1.F FID2.F FID3.F

## Polygon pours and split planes (outlines as drawn)
UGND on Top Layer "UGND_L01_P008" (solid, remove dead copper, pour order 8): 16,14 17,13 17,0 0,0 0,38 16,38
DGND on Top Layer "DGND_L01_P007" (solid, remove dead copper, pour order 7): 18,0 18,15 17,16 17,38 45,38 45,0
U5V on Top Layer "U5V_L01_P004" (solid, remove dead copper, pour order 4): 3.5,18 5.8,18 6.1,18.3 6.1,19.6 9,22.5 11.1,22.5 11.1,23.3 8.9,25.5 8.9,26.6 7.2,26.6 6,25.4 6,23 3.5,20.5 3.5,20.1
5VO on Top Layer "5VO_L01_P003" (solid, remove dead copper, pour order 3): 41.1,13.1 40.9,12.9 39,12.9 39,11.5 42.5,11.5 42.5,15 41.4,15 41.1,14.7 41.4,15 41.1,14.7
9V on Top Layer "9V_L01_P002" (solid, remove dead copper, pour order 2): 21,32.5 32.5,32.5 35,30 35,23 32.5,23 30.5,25 21,25
5VO on Top Layer "5VO_L01_P001" (solid, remove dead copper, pour order 1): 19,11.5 19,12.5 26.5,20 35.5,20 35.5,15.5 26,15.5 24.5,14 24.5,12 21.5,12 21,11.5
U5V on Top Layer "U5V_L01_P000" (solid, remove dead copper, pour order 0): 11,12.5 11,19.5 9,21.5 6,21.5 6,25 0.5,25 0.5,28 6.5,28 10,31.5 11.5,31.5 11.5,28 11,27.5 10,27.5 9.5,27 9.5,25.5 10,25 11,25 12,24 13,24 15,22 15,13.5 16,12.5 16,11.5 14,11.5 13,12.5
UGND on Bottom Layer "UGND_L02_P006" (solid, remove dead copper, pour order 6): 16,38 16,14 17,13 17,0 -1,0 -1,38
DGND on Bottom Layer "DGND_L02_P005" (solid, remove dead copper, pour order 5): 17,38 17,16 18,15 18,0 45,0 45,38

## Keep-outs
Keep-Out Layer:
  the board outline again, w0.2

## Other copper
Top Layer:
  pour cut-out: 11.6,11 11.6,6 12.3,6 12.3,11
  pour cut-out: 41,17.5 41,13.5 39.4,13.5 39.4,17.5

## Silkscreen, mask and mechanical layers (free items; w line width, h text height)
Top Overlay:
  lines w1: 16.5,36.5 16.5,15 17.5,14 17.5,1
  text "SPI | CAN | UART / ISOLATOR" at 16.8,32.6 h2.5
  text "INPUT" at 6.827,18.447 h2.5 r270
  text "OUTPUT" at 38.179,8.71 h2 r90
Bottom Overlay:
  lines w1: 16.5,36.5 16.5,15 17.5,14 17.5,1
  text "5V IN" at 10.212,27.616 h2
  text "GNDI" at 14.616,27.621 h2
  text "GNDO" at 21.634,27.621 h2
  text "9V" at 24.459,27.624 h2
  text "9V" at 32,23.425 h2
  text "5V IN" at 5.5,21.89 h2
  text "O 5V" at 43.237,21.884 h2
  text "GNDO" at 32,20.884 h2
  text "IN A<<" at 5.5,19.384 h2
  text "< OUT A" at 44.902,19.384 h2
  text "O 5V" at 32,18.344 h2
  text "IN B<<" at 5.5,16.887 h2
  text "< OUT B" at 44.775,16.884 h2
  text "IN C<<" at 5.5,14.384 h2
  text "< OUT C" at 44.82,14.384 h2
  text "> IN D" at 42.993,11.888 h2
  text "O D>>" at 5.5,11.884 h2
  text "GNDIN" at 5.5,9.384 h2
  text "GNDO" at 43.989,9.384 h2
  text "MADE IN SCOTLAND" at 34.5,1.747 h2
Route Tool Path:
  lines w2: -1,5 -1,2.5 ccw(c2.5,2.5) 2.5,-1 42.5,-1 ccw(c42.5,2.5) 46,2.5 46,4.5 ; -1,32.5 -1,35 cw(c2.5,35) 2.5,38.5 42.206,38.5 cw(c42.206,34.706) 46,34.706 46,33